# Altium PCB PCB5.PcbDoc
Units mm, origin at the board's own origin, x right, y up, seen from the top; angles counter-clockwise.
Board outline 166 x 110 mm, 2 copper layers (Top Layer, Bottom Layer); 138 components, 60 nets, 332 pads, 80 vias.
Unrouted connection lines stored in the file: 1.
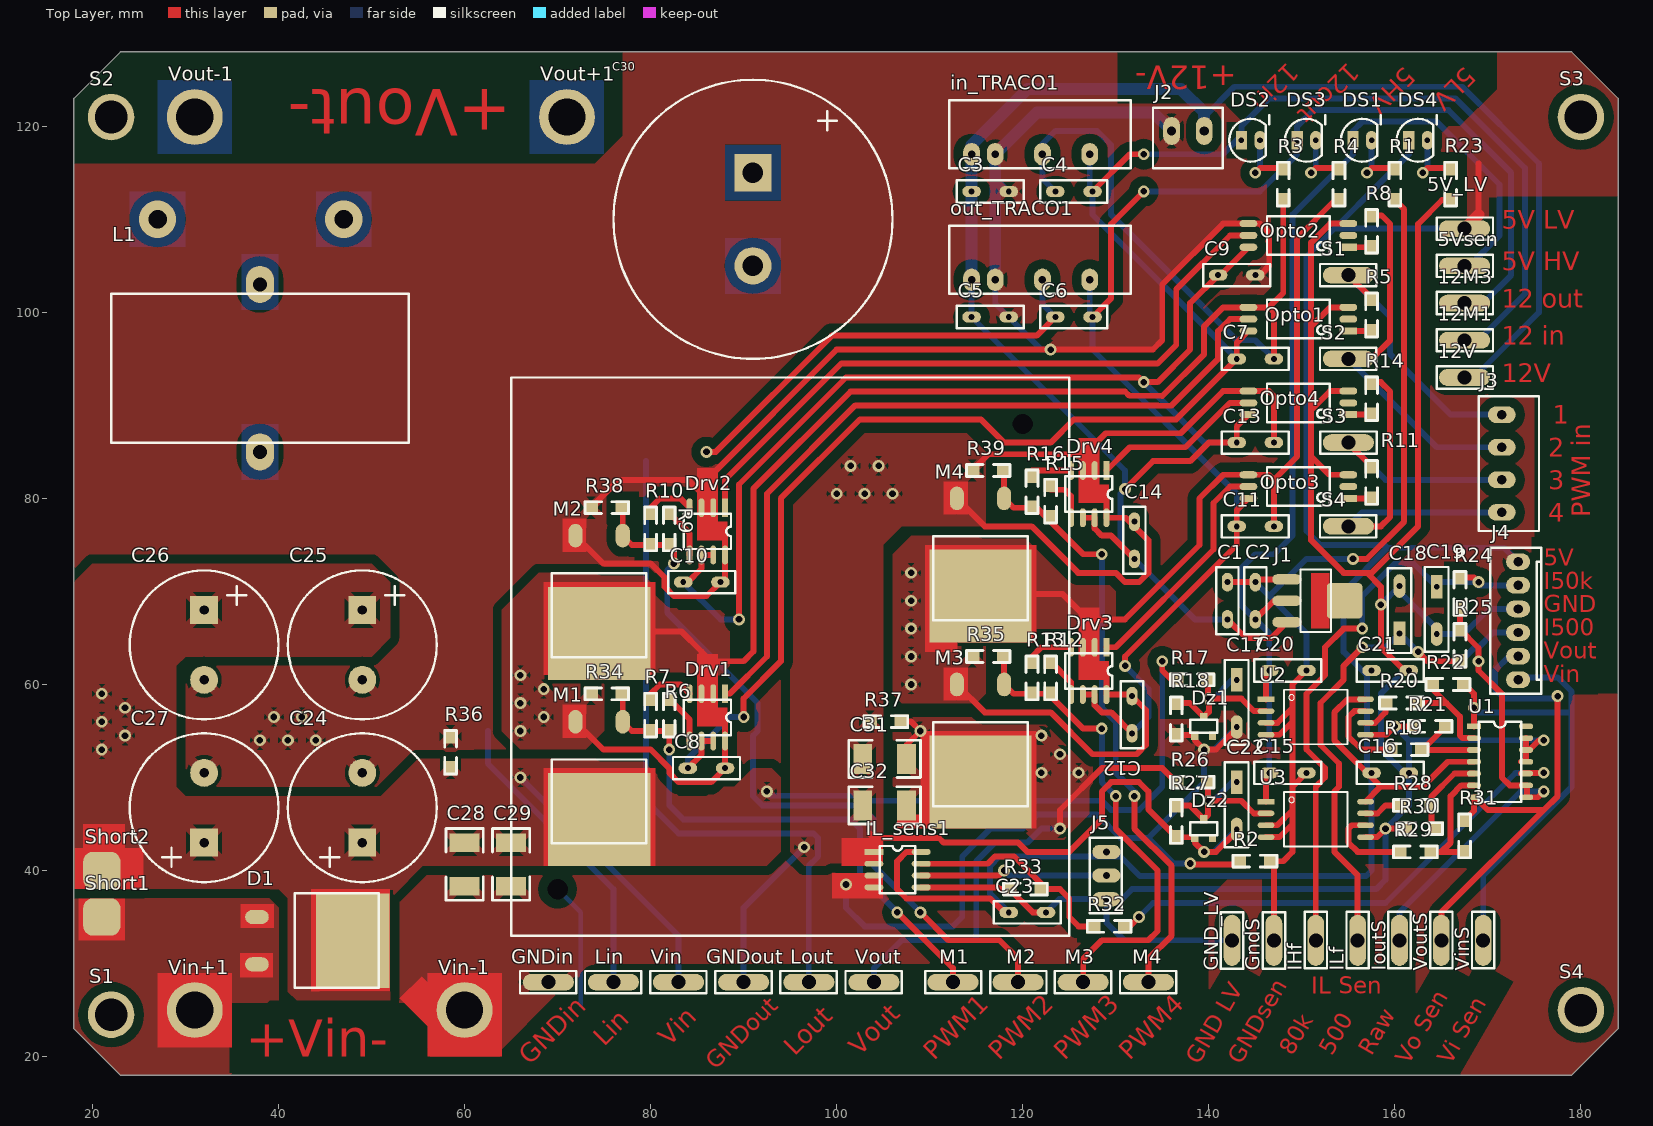
[diagram p0: Top Layer view]
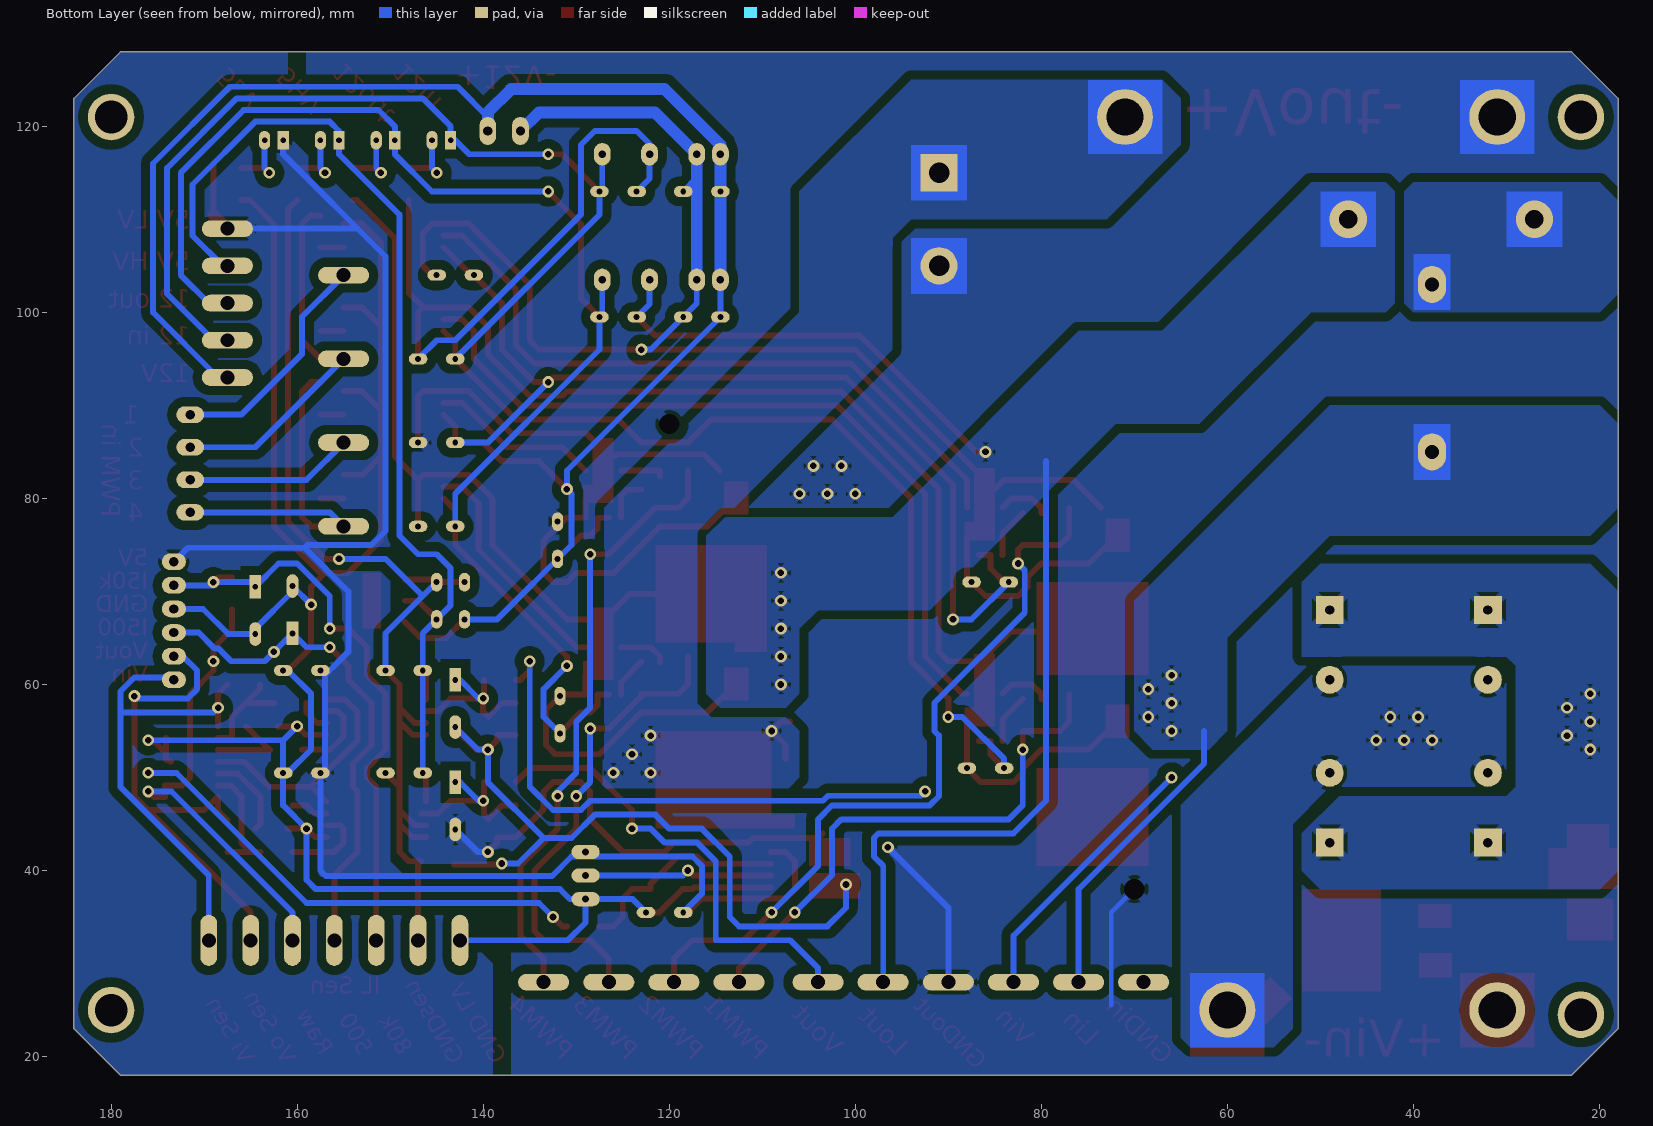
[diagram p1: Bottom Layer view, seen from below]

## Layer stack, top to bottom
Top Solder: solder mask 0.0102, Solder Resist, Dk 3.5
Top Layer: signal copper 0.0356
Dielectric 1: dielectric 0.32, FR-4, Dk 4.8
Bottom Layer: signal copper 0.0356
Bottom Solder: solder mask 0.0102, Solder Resist, Dk 3.5

## Board outline
18,123 23,128 179,128 184,123 184,23 179,18 23,18 18,23

## Design rules (kind name [scope] priority, off if disabled: settings)
Clearance "Polygon Pour" [InPolygon] p1: gap=1
Clearance [All] p2: gap=0.4
Clearance Defoult [InNet('No Net') And OnLayer('Top Layer')] p3: gap=0.4
PlaneConnect [All] p1: planeconnectstyle=Direct reliefexpansion=0.508 reliefentries=4 reliefconductorwidth=0.254 reliefairgap=0.254
PolygonConnect [All] p1: connectstyle=Relief reliefconductorwidth=1 reliefentries=4 polygonreliefangle="45 Angle" airgapwidth=0.4
RoutingVias [All] p1: holewidth=0.711 width=2 viastyle="Through Hole" minholewidth=0.711 minwidth=2 maxholewidth=0.711 maxwidth=2
SolderMaskExpansion [All] p1: expansion=0.102
UnConnectedPin [All] p1:
Width [All] p1: maxlimit=10 minlimit=0.5 preferedwidth=10
29 further rules are at their usual default settings.

## Classes and differential pairs
component class Signal_processing: B? C15 C16 C17 C18 C19 C20 C21 C22 C23 DS4 Dz1 Dz2 IHf IL_sens1 ILf IoutS J4 J5 R17 R18 R19 R20 R21 R22 R23 R24 R25 R26 R27 R28 R29 R30 R31 R32 R33 U1 U2 U3 U? VinS VoutS
component class Drivers: C7 C8 C9 C10 C11 C12 C13 C14 C? Drv1 Drv2 Drv3 Drv4 IC? J3 M1 M2 M3 M4 Opto1 Opto2 Opto3 Opto4 R5 R6 R7 R8 R9 R10 R11 R12 R13 R14 R15 R16 S1 S2 S3 S4
component class Power_supplies: 5V_LV 5Vsen 12M1 12M3 12V C1 C2 C3 C4 C5 C6 DS1 DS2 DS3 GND_LV GNDin GNDout GndS in_TRACO1 J1 J2 Lin Lout out_TRACO1 R1 R2 R3 R4 Vin Vout
component class Switches: C24 C25 C26 C27 C28 C29 C30 C31 C32 D1 L1 M1 M2 M3 M4 R34 R35 R36 R37 R38 R39 S1 S2 S3 S4 Short1 Short2 Vin+1 Vin-1 Vout+1 Vout-1

## Components (designator, comment, footprint, x,y, rotation, side; value= is the part's Value field where it differs from the comment)
5V_LV "Test Point" TEST_POINT 167.5,109 r270 top
5Vsen "Test Point" TEST_POINT 167.5,105 r270 top
12M1 "Test Point" TEST_POINT 167.5,97 r270 top
12M3 "Test Point" TEST_POINT 167.5,101 r270 top
12V "Test Point" TEST_POINT 167.5,93 r270 top
C1 "100nF" CAP100NF_AAU 142,71 r270 top
C2 "100nF" CAP100NF_AAU 145,71 r270 top
C3 "100nF" CAP100NF_AAU 118.5,113 r180 top
C4 "100nF" CAP100NF_AAU 127.5,113 r180 top
C5 "100nF" CAP100NF_AAU 118.5,99.5 r180 top
C6 "100nF" CAP100NF_AAU 127.5,99.5 r180 top
C7 "100nF" CAP100NF_AAU 143,95 r0 top
C8 "100nF" CAP100NF_AAU 88,51 r180 top
C9 "100nF" CAP100NF_AAU 141,104 r0 top
C10 "100nF" CAP100NF_AAU 87.5,71 r180 top
C11 "100nF" CAP100NF_AAU 143,77 r0 top
C12 "100nF" CAP100NF_AAU 131.75,58.75 r270 top
C13 "100nF" CAP100NF_AAU 143,86 r0 top
C14 "100nF" CAP100NF_AAU 132,77.5 r270 top
C15 "100nF" CAP100NF_AAU 150.5,50.5 r180 top
C16 "100nF" CAP100NF_AAU 161.5,50.5 r180 top
C17 "6.6nF" "CONDENSADOR_MKP_200MILIS - DUPLICATE" 143,60.5 r270 top
C18 "4.7nF" "CONDENSADOR_MKP_200MILIS - DUPLICATE" 160.5,65.5 r90 top
C19 "470pF" "CONDENSADOR_MKP_200MILIS - DUPLICATE" 164.5,70.5 r270 top
C20 "100nF" CAP100NF_AAU 150.5,61.5 r180 top
C21 "100nF" CAP100NF_AAU 161.5,61.5 r180 top
C22 "2.7nF" "CONDENSADOR_MKP_200MILIS - DUPLICATE" 143,49.5 r270 top
C23 "100nF" CAP100NF_AAU 122.5,35.5 r180 top
C24 "470µF" CE_16DX35MM_PITCH7.5MM 49,43 r90 top
C25 "470µF" CE_16DX35MM_PITCH7.5MM 49,68 r270 top
C26 "470µF" CE_16DX35MM_PITCH7.5MM 32,68 r270 top
C27 "470µF" CE_16DX35MM_PITCH7.5MM 32,43 r90 top
C28 "100nF" 1812 60,43 r270 top
C29 "1uF" 1812 65,43 r270 top
C30 "820µF" CE_30DX35MM_PITCH10MM 91,115 r270 top
C31 "100nF" 1812 107.5,52 r180 top
C32 "1uF" 1812 107.5,47 r180 top
D1 "????" "D2PAK - DIODE" 37.68,35 r270 top
Drv1 "NCP81074A" NCP81074A 88,59 r270 top
Drv2 "NCP81074A" NCP81074A 88,79 r270 top
Drv3 "NCP81074A" NCP81074A 129,64 r270 top
Drv4 "NCP81074A" NCP81074A 129,83 r270 top
DS1 "Verde" "LED 2MM" 157.5,118.5 r270 top
DS2 "Verde" "LED 2MM" 145.5,118.5 r270 top
DS3 "Verde" "LED 2MM" 151.5,118.5 r270 top
DS4 "Verde" "LED 2MM" 163.5,118.5 r270 top
Dz1 "4.7V" "SOT23 - ZENNER" 138.5,54.5 r0 top
Dz2 "4.7V" "SOT23 - ZENNER" 138.5,43.5 r0 top
GND_LV "Test Point" TEST_POINT 142.5,32.5 r180 top
GNDin "Test Point" TEST_POINT 69,28 r90 top
GNDout "Test Point" TEST_POINT 90,28 r90 top
GndS "Test Point" TEST_POINT 147,32.5 r180 top
IHf "Test Point" TEST_POINT 151.5,32.5 r0 top
IL_sens1 "ACS723LLCTR-20AB-T" SOIC8_GND 104,42 r0 top
ILf "Test Point" TEST_POINT 156,32.5 r0 top
in_TRACO1 "TRACO" TRACO_TMA1212S 114.5,117 r0 top
IoutS "Test Point" TEST_POINT 160.5,32.5 r0 top
J1 "LD1117" SOT-223_LM1117 151.5,69 r270 top
J2 "Cleva 2 vias" "CON2_EXTRON _3.5MMPITCH" 136,119.5 r0 top
J3 "CON4" "CON4_EXTRON _3.5MMPITCH" 171.5,78.5 r90 top
J4 "CON6" CON6_KK_256 173.25,60.5 r90 top
J5 "Cleva 2 vias" CON_3_100MILIS 129,42 r0 top
L1 "mH" TORUS_COIL_1MH 38,85 r90 top
Lin "Test Point" TEST_POINT 76,28 r90 top
Lout "Test Point" TEST_POINT 97,28 r90 top
M1 "MOSFET N" "D2PAK - MOSFET" 77,56 r180 top
M1 "Test Point" TEST_POINT 112.5,28 r270 top
M2 "Test Point" TEST_POINT 119.5,28 r270 top
M2 "MOSFET N" "D2PAK - MOSFET" 77,76 r180 top
M3 "Test Point" TEST_POINT 126.5,28 r90 top
M3 "MOSFET N" "D2PAK - MOSFET" 118,60 r180 top
M4 "Test Point" TEST_POINT 133.5,28 r90 top
M4 "MOSFET N" "D2PAK - MOSFET" 118,80 r180 top
Opto1 "ACPL-W70L" SSOIC6 155,98 r180 top
Opto2 "ACPL-W70L" SSOIC6 155,107 r180 top
Opto3 "ACPL-W70L" SSOIC6 155,80 r180 top
Opto4 "ACPL-W70L" SSOIC6 155,89 r180 top
out_TRACO1 "TRACO" TRACO_TMA1212S 114.5,103.5 r0 top
R1 "RK" 1206 160,115.5 r270 top
R2 "Res. Bridge" 1206 143.25,41 r0 top
R3 "RK" 1206 148,115.5 r270 top
R4 "RK" 1206 154,115.5 r270 top
R5 "560OHM" 1206 157.5,98 r90 top
R6 "25" 1206 82,55 r90 top
R7 "25" 1206 80,55 r90 top
R8 "560OHM" 1206 157.5,107 r90 top
R9 "560OHM" 1206 82,75 r90 top
R10 "560OHM" 1206 80,75 r90 top
R11 "560OHM" 1206 157.5,80 r90 top
R12 "560OHM" 1206 123,59 r90 top
R13 "560OHM" 1206 121,59 r90 top
R14 "560OHM" 1206 157.5,89 r90 top
R15 "560OHM" 1206 123,78 r90 top
R16 "560OHM" 1206 121,79 r90 top
R17 "47k" 1206 136.5,60.5 r0 top
R18 "2k" 1206 136.5,58 r270 top
R19 "11k" 1206 159.5,53 r0 top
R20 "11k" 1206 159,58 r0 top
R21 "27k" 1206 165.5,55.5 r180 top
R22 "27k" 1206 164,60 r0 top
R23 "RK" 1206 166,115.5 r270 top
R24 "6k8" 1206 167,71.5 r270 top
R25 "68k" 1206 167,62.5 r90 top
R26 "120k" 1206 136.5,49.5 r0 top
R27 "2k" 1206 136.5,47 r270 top
R28 "11k" 1206 160.5,47 r0 top
R29 "11k" 1206 160.5,42 r0 top
R30 "27k" 1206 164.5,44.5 r180 top
R31 "27k" 1206 167.5,42 r90 top
R32 "10k" 1206 131,34 r180 top
R33 "10k" 1206 122,38 r180 top
R34 "68K" 1206 77,59 r180 top
R35 "68K" 1206 118,63 r180 top
R36 "33K" 1206 58.5,51 r90 top
R37 "47K" 1206 107,56 r180 top
R38 "68K" 1206 77,79 r180 top
R39 "68K" 1206 118,83 r180 top
S1 "Test Point" TEST_POINT 155,104 r90 top
S1 "Support" SUPPORT 22,24.5 r0 top
S2 "Test Point" TEST_POINT 155,95 r90 top
S2 "Support" SUPPORT 22,121 r0 top
S3 "Test Point" TEST_POINT 155,86 r270 top
S3 "Support" SUPPORT 180,121 r0 top
S4 "Test Point" TEST_POINT 155,77 r90 top
S4 "Support" SUPPORT 180,25 r0 top
Short1 "CON1" SHORTPAD 21,35 r90 top
Short2 "CON1" SHORTPAD 21,40 r90 top
U1 "LMC6484IM" SOIC_14 168.5,55.5 r0 top
U2 "ACPL-C870-000E" SSOP8 151.5,56.5 r0 top
U3 "ACPL-C870-000E" SSOP8 151.5,45.5 r0 top
Vin "Test Point" TEST_POINT 83,28 r90 top
Vin+1 "CON1" POWERHOLE 31,25 r0 top
Vin-1 "CON1" POWERHOLE 60,25 r0 top
VinS "Test Point" TEST_POINT 169.5,32.5 r0 top
Vout "Test Point" TEST_POINT 104,28 r90 top
Vout+1 "CON1" POWERHOLE 71,121 r0 top
Vout-1 "CON1" POWERHOLE 31,121 r0 top
VoutS "Test Point" TEST_POINT 165,32.5 r0 top

## Footprints (in the part's own frame and the unit in brackets; to place one, negate y for a bottom-side part, rotate by r counter-clockwise, add the part's x,y. Pads: shape width x height; smd on the part's side, far side on the other; paste and mask are expansions set on the pad)
1206 [mil] "SMD R&C"
  rect 60x60 smd: 1(0,0) 2(135,0)
  silkscreen extent -25,-25 160,25, body extent 2,-31 128,31
1812 [mm]
  rect 2x3.2 smd: 1(0,0) 2(4.7,0)
  silkscreen extent -1.5,-2 6.2,2
CAP100NF_AAU [mm] "10nF 1600v"
  oval 2x1.2 hole 0.635: 1(0,0) 2(4,0)
  silkscreen extent -1.6,-1.2 5.6,1.2
CE_16DX35MM_PITCH7.5MM [mm]
  rect 3x3 hole 1: 1(0,0)
  round 3 hole 1: 2(7.5,0)
  silkscreen extent -4.25,-8 11.75,8
CE_30DX35MM_PITCH10MM [mm]
  rect 4x4 hole 2.2: 1(0,0)
  round 4 hole 2.2: 2(10,0)
  silkscreen extent -10,-15 20,15
"CON2_EXTRON _3.5MMPITCH" [mm]
  oval 1.8x3 hole 1: 1(0,0) 2(3.5,0)
  silkscreen extent -2,-4 5.5,2.5
"CON4_EXTRON _3.5MMPITCH" [mm]
  oval 1.8x3 hole 1: 1(0,0) 2(3.5,0) 3(7,0) 4(10.5,0)
  silkscreen extent -2,-4 12.5,2.5
CON6_KK_256 [mm]
  oval 1.8x2.6 hole 1: 1(0,0) 2(2.54,0) 3(5.08,0) 4(7.62,0) 5(10.16,0) 6(12.7,0)
  silkscreen extent -1.5,-2.5 14.2,3
CON_3_100MILIS [mil]
  oval 120x60 hole 29.53: 1(0,0) 2(0,-100) 3(0,-200)
  silkscreen extent -70,-260 65,60
"CONDENSADOR_MKP_200MILIS - DUPLICATE" [mm] "10nF 1600v"
  rect 2.54x1.27 hole 0.635: 1(0,0)
  oval 2.54x1.27 hole 0.635: 2(5.08,0)
  silkscreen extent -2.12,-1.27 6.98,1.27
"D2PAK - DIODE" [mil] "TO220-superficie"
  oval 60x100 smd: A(0,0) A(200,0)
  rect 400x310 smd: K(100,405)
  silkscreen extent -100,160 300,515
"D2PAK - MOSFET" [mm] "TO220-superficie"
  rect 11x10 smd: D(2.54,10.5)
  oval 1.524x2.54 smd: G(0,0) S(5.08,0)
  silkscreen extent -2.54,4.06 7.62,13.08
"LED 2MM" [mm] "no está modificado"
  rect 2x1.2 hole 0.6: A(0,-2)
  oval 2x1.2 hole 0.6: K(0,0)
  silkscreen extent -2.72,-3.3 2.3,1
NCP81074A [mil] "Driver"
  rect 80x25 smd: 1(0,0)
  oval 80x25 smd: 2(0,-50) 3(0,-100) 4(0,-150) 5(200,-150) 6(200,-100) 7(200,-50) 8(200,0)
  silkscreen extent 25,-175 175,25
POWERHOLE [mm]
  round 6 hole 4: 1(0,0)
SHORTPAD [mm]
  rrect50% 4x4 smd: 1(0,0)
SOIC8_GND [mil] "Con plano de masa inferior"
  rect 80x25 smd: 1(0,0)
  oval 80x25 smd: 2(0,-50) 3(0,-100) 4(0,-150) 5(200,-150) 6(200,-100) 7(200,-50) 8(200,0)
  silkscreen extent 25,-175 175,25
SOIC_14 [mil]
  rect 60x24 smd: 1(0,0)
  oval 60x24 smd: 2(0,-50) 3(0,-100) 4(0,-150) 5(0,-200) 6(0,-250) 7(0,-300) 8(220.47,-300) 9(220.47,-250) 10(220.47,-200) 11(220.47,-150) 12(220.47,-100) 13(220.47,-50) 14(220.47,0)
  silkscreen extent 20,-320 201,20
"SOT23 - ZENNER" [mm] "Transistor SMD"
  rect 0.8x0.9 smd: A(0,0) K(0.95,2) NC(1.9,0)
  silkscreen extent -0.5,0.3 2.4,1.7
SOT-223_LM1117 [mm] "SOT-223/SC-73; 4 Leads; Body 6.7 x 7.3 mm, inc. leads (LxW max)"
  oval 1.1x3.15 smd: 1(-2.3,-3.1) 2(0,-3.1) 3(2.3,-3.1)
  rrect20% 3.8x3.8 smd: ""(0,3.1)
  silkscreen extent -3.35,-1.63 3.35,1.63
SSOIC6 [mm] "Circuito de 6 patas SMD"
  rect 1.91x0.762 smd: 1(0,0)
  oval 1.91x0.762 smd: 2(0,-1.27) 3(0,-2.54) 4(10.74,-2.54) 5(10.74,-1.27) 6(10.74,0)
  silkscreen extent 2,-3.34 8.74,0.8
SSOP8 [mm]
  rect 1.8x0.6 smd: 1(-5.35,1.905)
  oval 1.8x0.6 smd: 2(-5.35,0.635) 3(-5.35,-0.635) 4(-5.35,-1.905) 5(5.35,-1.905) 6(5.35,-0.635) 7(5.35,0.635) 8(5.35,1.905)
  silkscreen extent -3.4,-2.93 3.4,2.93
SUPPORT [mm]
  round 5 hole 3.5: ""(0,0)
TEST_POINT [mm]
  oval 1.8x5.5 hole 1.5: 1(0,0)
  silkscreen extent -1.2,-3 1.2,3.05
TORUS_COIL_1MH [mm]
  oval 4x3 hole 1.5: 1(0,0) 2(18,0)
  silkscreen extent 1,-16 17,16
TRACO_TMA1212S [mm]
  oval 1.8x2.4 hole 0.8: 1(0,0) 2(2.54,0) 4(7.62,0) 6(12.7,0)
  silkscreen extent -2.4,-1.5 17.1,5.8

## Part data
C1 C2 C3 C4 C5 C6 C7 C8 C9 C10 C11 C12 C13 C14 C15 C16 C17 C18 C19 C20 C21 C22 C23 C28 C29 C31 C32: library part Condensador, "Condensador"
C24 C25 C26 C27 C30: library part Cond_Electrolítico, "Condensador Aluminio con polaridad"
D1: library part Diodo, "Diodo"
DS1 DS2 DS3 DS4: library part Led
Dz1 Dz2: library part Zener
IL_sens1: "Current Sensor AC/DC 5V 8-Pin SOIC N Allegro Microsystems ACS723LLCTR-20AB-T, Current Sensor, 8-Pin, SOIC"
in_TRACO1 out_TRACO1: "TracoPower TMA1212S"
J1: "Linear voltage regulator"
J2: library part Con_2
J4: "CONECTOR 6 PINES"
J5: library part Con_3
L1: library part Bobina
M1 M2 M3 M4: "MOSFET de canal N"
R1 R3 R4 R5 R6 R7 R8 R9 R10 R11 R12 R13 R14 R15 R16 R17 R18 R19 R20 R21 R22 R23 R24 R25 R26 R27 R28 R29 R30 R31 R32 R33 R34 R35 R36 R37 R38 R39: library part Resistencia, "Resistencia"
R2: "Resistencia Bridge"
U1: library part LMC6484IM_1, "14 pin CMOS Quad Rail to Rail Input and Output Operational Amplifier 55 per tube"
U2 U3: "Isolation Amplifier [Broadcom] ACPL-C870-000E Isolation Amplifier"

## Free pads (board coordinates)
  round 0.508 hole 2.2: 2(70,38) 2(120,88)

## Via types
v1: diameter 1.27, hole 0.711, Top Layer to Bottom Layer, 78 vias
v2: diameter 4, hole 2, Top Layer to Bottom Layer, 2 vias

## Nets (pads, with @x,y where several pads share a name; then routed paths per layer and width w, separated by ;. In a path a pad name is that pad's centre, name@x,y a point inside that pad or via, vN(x,y) a via of type N, cw(c..) or ccw(c..) an arc to the next point about the centre after c; other vN are vias at no path point)
5V_HV: 5Vsen.1 C2.2 C15.2 C20.2 DS1.A J1.2 U2.1 U3.1 | length 115.6
  Top Layer w0.635: C2.2 147,69 J1.2 ; U3.1 146.15,50.15 C15.2 ; U2.1 146.15,61.15 C20.2
  Bottom Layer w0.635: C15.2 C20.2 146.5,65.5 C2.2 143.5,68.5 143.5,72.5 145,74 147,74 149,76 149,110.5 155.5,117 DS1.A@155.5,117.5 ; DS1.A 155.5,119.5 156.5,120.5 164.5,120.5 171.25,113.75 171.25,108.25 168,105 5Vsen.1
5V_LV: 5V_LV.1 C16.2 C21.2 C23.2 DS4.A IL_sens1.8 J4.6 J5.1 U1.4 U2.8 U3.8 | length 226.8
  Top Layer w0.635: IL_sens1.8 107.5,42 106.5,41 106.5,38 107.5,37 116.5,37 118,35.5 C23.2 ; U2.8 154.905,58.405 153.5,57 153.5,54 158.472,49.027 U3.8 158.445,49 163,49 165.69,51.69 U1.4 ; 169,110.5 169,116
  Top Layer w1.27: 5V_LV.1 169,110.5
  Bottom Layer w0.635: C23.2 116.5,37.5 116.5,40.5 117.5,41.5 130.5,41.5 132.602,39.398 156.897,39.398 157.5,40 157.5,50 157,50.5 157,61 154.5,63.5 154.5,70 159.2,74.7 ; 153.5,109 5V_LV.1 ; DS4.A@161.5,117.5 161.5,117 150.5,106 150.5,76.5 152,75 158.9,75 159.2,74.7 ; J4.6@173.8,73.2 J4.6 171.75,74.7 159.2,74.7
12V_HV_HS_IN: 12M1.1 C4.1 C7.1 C8.2 Drv1.6 Drv1.7 DS2.A in_TRACO1.6 Opto1.6 | length 205.1
  Top Layer w0.635: C8.2 85.46,52.46 Drv1.6 Drv1.7 ; v1(90,56.5) 90,58.5 94,62.5 94,80 102.5,88.5 115.5,88.5 118,86 123,86 125.5,88.5 136.5,88.5 C7.1 143,96.74 Opto1.6 ; C4.1 131.5,117 v1(133,117)
  Bottom Layer w0.635: C8.2 84,52 88.5,56.5 v1(90,56.5) ; in_TRACO1.6 127.2,113.3 C4.1 127.5,110.5 C7.1 ; v1(133,117) 141.5,117 DS2.A@143.5,119 ; DS2.A 143.5,120 146.5,123 166.5,123 174,115.5 174,102 169,97 12M1.1
12V_HV_HS_OUT: 12M3.1 C6.1 C11.1 C12.2 Drv3.6 Drv3.7 DS3.A Opto3.6 out_TRACO1.6 | length 152.4
  Top Layer w0.635: Drv3.6 Drv3.7 127.73,57.77 128.5,57 129.5,57 C12.2 ; C6.1 129.5,101.5 129.5,109.5 v1(133,113) ; v1(131,62) 131,63 143,75 C11.1 143,78.74 Opto3.6
  Bottom Layer w0.635: out_TRACO1.6 127.2,99.8 C6.1 127.5,96 143,80.5 C11.1 ; v1(131,62) 133.5,59.5 133.5,56.5 C12.2 ; v1(133,113) 145.5,113 149.5,117 DS3.A 149.5,120 151.25,121.75 165.75,121.75 172.5,115 172.5,104 12M3.1@169.5,101 ; 12M3.1 12M3.1@168,101
12V_HV_LS: 12V.1 C1.2 C3.2 C5.2 C9.1 C10.2 C13.1 C14.2 Drv2.6 Drv2.7 Drv4.6 Drv4.7 in_TRACO1.1 J1.3 J2.2 Opto2.6 Opto4.6 out_TRACO1.1 | length 303.5
  Top Layer w0.635: C10.2@84,71 85.46,72.46 Drv2.6 Drv2.7 ; v1(89.5,67) 89.5,81.5 101,93 132.5,93 v1(133,92.5) 134.5,92.5 138,96 138,101 C9.1 ; Drv4.6 Drv4.7 127.73,76.77 128.5,76 129.5,76 C14.2 ; v1(131,81) 134,84 138,84 140,86 C13.1 143,87.74 Opto4.6 ; C9.1@141,103.74 Opto2.6 ; C1.2 144,65 146.7,65 J1.3
  Bottom Layer w0.635: C10.2 87.5,67 v1(89.5,67) ; out_TRACO1.1 C5.2 131,83 v1(131,81) 130.5,80.5 130.5,75 138.5,67 C1.2 ; v1(133,92.5) 139.5,86 C13.1 ; 139.5,121 142.75,124.25 167.25,124.25 175.5,116 175.5,100 168.5,93 12V.1
  Bottom Layer w1.27: out_TRACO1.1 C3.2 in_TRACO1.1 114.5,118 120.5,124 137,124 139.5,121.5 139.5,121
GND_HV_HS_IN: C4.2 C7.2 C8.1 Drv1.2 Drv1.3 Drv1.8 in_TRACO1.4 L1.1 Lin.1 M1.S M2.D Opto1.4 R3.2 R34.2 | length 231.7
  Top Layer w0.635: M1.S 74.92,53 80,53 82,51 82,50.5 83,49.5 86.5,49.5 C8.1 Drv1.8 88,56 86.73,57.27 Drv1.2 Drv1.3 85.46,63.54 ; M2.D@74.46,65.713 83.287,65.713 85.46,63.54 ; 134.965,91.035 131.465,91.035 131,91.5 101.5,91.5 91.035,81.035 91.035,63.535 90,62.5 86.5,62.5 85.46,63.54 ; 135,91 139.5,95.5 139.5,98.5 141.54,100.54 Opto1.4 146.46,100.54 ; C7.2 147,100 146.46,100.54 ; R3.2 148,102.08 146.46,100.54
  Bottom Layer w0.635: 62.5,55 62.5,51.5 76,38 Lin.1 ; C4.2 122.12,114.38 in_TRACO1.4 122.12,118.12 123.5,119.5 128,119.5 129.5,118 129.5,110.5 143,97 145,97 C7.2
  other v1: 66,55 68.5,56.5 66,58 68.5,59.5 66,61
GND_HV_HS_OUT: C6.2 C11.2 C12.1 Drv3.2 Drv3.3 Drv3.8 L1.2 Lout.1 M3.S M4.D Opto3.4 out_TRACO1.4 R4.2 R35.2 | length 244.1
  Top Layer w0.635: v1(86,85) 87,85 99.5,97.5 121.5,97.5 C6.2 ; M3.S 115.92,57 123,57 127.5,52.5 132.25,52.5 133.25,53.5 133.25,57.25 131.58,58.92 Drv3.8 129,61 127.73,62.27 Drv3.2 Drv3.3 126.46,67.54 ; M4.D@115.46,69.713 124.287,69.713 126.46,67.54 ; C11.2 147,82 ; R4.2 153.571,112.071 149.5,108 149.5,84.5 147,82 ; 126.46,67.54 127,67 131,67 139,75 139,80 141.54,82.54 Opto3.4 146.46,82.54 147,82
  Bottom Layer w0.635: 79.5,84 79.5,47.5 83,44 97.5,44 98,43.5 98,41.5 97,40.5 Lout.1 ; out_TRACO1.4 122.12,100.88 C6.2
  other v1: 108,60 108,63 108,66 108,69 108,72
  other v2: 27,110 47,110
GND_HV_LS_IN: C3.1 C5.1 C9.2 C10.1 C17.2 C24.2 C25.2 C26.2 C27.2 C28.2 C29.2 Drv2.2 Drv2.3 Drv2.8 Dz1.A GNDin.1 IL_sens1.3 IL_sens1.4 in_TRACO1.2 J2.1 M2.S Opto2.4 out_TRACO1.2 R2.1 R18.2 R36.2 R38.2 Vin-1.1 | length 257
  Top Layer w0.635: M2.S 74.92,73 80,73 81.5,71.5 81.5,70.5 82.5,69.5 86,69.5 C10.1 88,71.5 Drv2.8 88,76 86.73,77.27 Drv2.2 Drv2.3 85.46,80.54 ; R38.2 76.571,82 84,82 85.46,80.54 ; R18.2 138.429,54.571 Dz1.A 138.5,54 v1(139.5,53) 140.765,53 143,55.235 C17.2 ; v1(138,40.75) 138.103,40.648 R2.1@143.147,40.648 ; C9.2 145.5,104 146.5,105 146.5,108.5 145.46,109.54 Opto2.4 141.54,109.54 135,103 135,97 134,96 100,96 86.5,82.5 86.5,81.58 85.46,80.54
  Bottom Layer w0.635: v1(101,38.5) 101,36 103,34 112.5,34 113.5,35 113.5,41.5 116.5,44.5 120,44.5 121.5,46 128,46 130.5,43.5 133.5,43.5 ; out_TRACO1.2 117.04,100.96 C5.1 122,96 v1(123,96) ; 117.04,114.46 C3.1 ; v1(138,40.75) 136.25,40.75 133.5,43.5 ; C17.2 140.58,53 v1(139.5,53) 139.5,49.5 133.5,43.5
  Bottom Layer w1.27: out_TRACO1.2 117.04,114.46 in_TRACO1.2 121.54,121.5 134,121.5 J2.1
  other v1: 38,54 41,54 44,54 39.5,56.5 42.5,56.5
GND_HV_LS_OUT: C13.2 C14.1 C22.2 C30.2 C31.2 C32.2 Drv4.2 Drv4.3 Drv4.8 Dz2.A GNDout.1 IL_sens1.1 IL_sens1.2 M4.S Opto4.4 pad.2 R27.2 R37.2 R39.2 Vout-1.1 | length 169.6
  Top Layer w0.635: 103.5,44 104,43.5 111,43.5 111.5,43 119.5,43 120.5,42 125,42 128.5,45.5 128.5,48.5 129.5,49.5 132.5,49.5 133.5,48.5 133.5,46.571 R27.2 138.429,43.571 Dz2.A 138.5,43 v1(139.5,42) 140.765,42 143,44.235 C22.2 ; M4.S 115.92,77 120.961,77 125.961,72 130,72 131,71 132.5,71 133.5,72 133.5,75.5 131.08,77.92 Drv4.8 129,80 127.73,81.27 Drv4.2 Drv4.3 126.46,84.54 ; R39.2 116.321,84.75 125.602,84.75 125.812,84.54 126.46,84.54 ; C13.2 147,91 146.46,91.54 Opto4.4 141.54,91.54 137,87 128.92,87 126.46,84.54
  Bottom Layer w0.5: pad.2@70,38 72.5,35.5 72.5,25.5
  Bottom Layer w0.635: GNDout.1 90,36 v1(96.5,42.5) ; v1(139.5,42) 140.58,42 C22.2
  other v1: 100,80.5 103,80.5 106,80.5 101.5,83.5 104.5,83.5
GND_HV_SENSORS: C1.1 C2.1 C15.1 C20.1 GndS.1 J1.1 R1.2 R2.2 U2.3 U2.4 U3.3 U3.4 | length 118.4
  Top Layer w0.635: C1.1 C2.1 145.3,71.3 J1.1 ; U3.4 147.595,43.595 149,45 ; U3.3 147.365,44.865 149,46.5 ; U2.4 147.595,54.595 149,56 ; U2.3 147.365,55.865 149,57.5 ; GndS.1@147,32.75 147,40.679 R2.2 148,41 149,42 149,45 ; C15.1 149,49 ; C20.1 149,60 149,57.5 ; v1(155.5,73.5) 157,73.5 161,77.5 161,111.071 R1.2 ; 149,45 149,46.5 ; 149,46.5 149,49 ; 149,49 149,56 ; 149,56 149,57.5
  Bottom Layer w0.635: C2.1 146.5,69.5 ; C20.1 150.5,65.5 146.5,69.5 ; v1(155.5,73.5) 150.5,73.5 146.5,69.5
GND_LV: C16.1 C18.2 C19.2 C21.1 C23.1 GND_LV.1 IL_sens1.5 J4.4 J5.3 Opto1.3 Opto2.3 Opto3.3 Opto4.3 R21.2 R23.2 R30.2 R33.2 U1.11 U1.12 U1.13 U2.5 U3.5 | length 265
  Top Layer w0.635: IL_sens1.5 117.31,38.19 117.5,38 R33.2 121.071,35.5 C23.1 ; 151,84.5 152.96,82.54 Opto3.3 ; 151,89.5 153.04,91.54 Opto4.3 ; Opto1.3 153.04,100.54 151,98.5 ; Opto2.3 153.04,109.54 151,107.5 151,98.5 ; U3.5 158.095,43.595 v1(159,44.5) R30.2 ; U2.5 159.095,54.595 v1(160,55.5) R21.2 ; C21.1@161,61.5 158.5,64 v1(158.5,68.58) 158.5,70.5 157,72 ; R23.2 165.071,112.071 162.5,109.5 162.5,77 157.5,72 157,72 ; U1.11@173.58,51.69 174.08,51.908 U1.13@174.08,54.23 ; U1.12@174.08,52.96 174.46,52.96 175.5,54 v1(176,54) ; 151,98.5 151,75.5 154.5,72 157,72
  Bottom Layer w0.635: C23.1 123.92,36.92 J5.3 ; GND_LV.1 130.9,32.5 129,34.4 J5.3 ; v1(158.5,68.58) C18.2 ; v1(160,55.5) 161.5,54 ; C18.2@160.5,70 164.5,66 C19.2 167.42,65.42 170.12,68.12 J4.4 ; C16.1@161,50.5 158.5,53 158.5,59 C21.1@161,61.5 ; v1(176,54) 161.5,54 ; J5.3 130.67,36.92 131.75,38 158,38 159,39 v1(159,44.5) 161.5,47 C16.1 161.5,54
NetC18_1: C18.1 ILf.1 J4.3 R25.1 | length 60.1
  Top Layer w0.635: ILf.1@156,32.75 156,39.5 153.5,42 153.5,48.5 154,49 154,51.5 152,53.5 152,58 154.5,60.5 154.5,62 v1(156.5,64) ; v1(162.5,63.5) 163.5,62.5 R25.1
  Bottom Layer w0.635: v1(156.5,64) 159,64 C18.1 163.5,62.5 167.087,62.5 168.44,63.852 168.852,63.852 170.58,65.58 173,65.58 J4.3@173.25,65.83
NetC19_1: C19.1 IHf.1 J4.5 R24.1 | length 63.5
  Top Layer w0.635: IHf.1@151.5,32.75 151.5,49 152.5,50 152.5,51 150.5,53 150.5,59 152.5,61 152.5,64 154.5,66 v1(156.5,66) ; R24.1 168.5,71.5 v1(169,71)
  Bottom Layer w0.635: v1(156.5,66) 156.5,69.5 160,73 162,73 C19.1 165,71 v1(169,71) 169,70.66 172.7,70.66 J4.5@173,70.96
NetD1_A: D1.A Short1.1 Vin+1.1
NetDrv1_1: Drv1.1 Opto1.5 | length 85
  Top Layer w0.635: Drv1.1 88.5,59 92.5,63 92.5,80.5 102,90 134.536,90 134.571,89.965 135.965,89.965 141,95 141,98 142.27,99.27 Opto1.5
NetDrv1_4: Drv1.4 R7.2 | length 5.6
  Top Layer w0.635: R7.2 80,59 81,60 83.19,60 Drv1.4
NetDrv1_5: Drv1.5 R6.2 | length 5.4
  Top Layer w0.635: R6.2 84.19,56.239 Drv1.5
NetDrv2_1: Drv2.1 Opto2.5 | length 73.7
  Top Layer w0.635: Drv2.1 88,82 100.5,94.5 134.5,94.5 136.5,96.5 136.5,102.5 142.27,108.27 Opto2.5
NetDrv2_4: Drv2.4 R10.2 | length 5.6
  Top Layer w0.635: R10.2 80,79 81,80 83.19,80 Drv2.4
NetDrv2_5: Drv2.5 R9.2 | length 5.4
  Top Layer w0.635: R9.2 84.19,76.239 Drv2.5
NetDrv3_1: Drv3.1 Opto3.5 | length 25.3
  Top Layer w0.635: Drv3.1 130,64 140.5,74.5 140.5,79.5 142.27,81.27 Opto3.5
NetDrv3_4: Drv3.4 R13.2 | length 5.2
  Top Layer w0.635: R13.2 121,63 122,64 Drv3.4
NetDrv3_5: Drv3.5 R12.2 | length 4.4
  Top Layer w0.635: R12.2 125.19,60.239 Drv3.5
NetDrv4_1: Drv4.1 Opto4.5 | length 18.3
  Top Layer w0.635: Drv4.1 131.5,85.5 137.5,85.5 142.27,90.27 Opto4.5
NetDrv4_4: Drv4.4 R16.2 | length 4.8
  Top Layer w0.635: R16.2 121,83 Drv4.4
NetDrv4_5: Drv4.5 R15.2 | length 4.8
  Top Layer w0.635: R15.2@123,80.929 124.5,80.929 125.19,80.239 Drv4.5
NetDS1_K: DS1.K R1.1 | length 6.9
  Top Layer w0.635: v1(157,115) 157.5,115.5 R1.1
  Bottom Layer w0.635: v1(157,115) 157.5,115.5 DS1.K
NetDS2_K: DS2.K R3.1 | length 7.4
  Top Layer w0.635: v1(145,115) 145.5,115.5 R3.1
  Bottom Layer w0.635: v1(145,115) 145.5,115.5 DS2.K DS2.K@145.5,119
NetDS3_K: DS3.K R4.1 | length 6.9
  Top Layer w0.635: v1(151,115) 151.5,115.5 R4.1
  Bottom Layer w0.635: v1(151,115) 151.5,115.5 DS3.K
NetDS4_K: DS4.K R23.1 | length 6.9
  Top Layer w0.635: v1(163,115) 163.5,115.5 R23.1
  Bottom Layer w0.635: v1(163,115) 163.5,115.5 DS4.K
NetIL_sens1_6: IL_sens1.6 J5.2 | length 20.4
  Top Layer w0.635: IL_sens1.6 117.46,39.46 v1(118,40)
  Bottom Layer w0.635: v1(118,40) 118.54,39.46 J5.2
NetIL_sens1_7: IL_sens1.7 R32.2 R33.1 | length 23.4
  Top Layer w0.635: IL_sens1.7 116.23,40.73 117,41.5 119.071,41.5 122,38.571 R33.1 124,38 125,37 125,35 126,34 R32.2
NetIoutS_1: IoutS.1 R24.2 R25.2 U1.8 U1.9 | length 50.2
  Top Layer w0.635: R24.2 R25.2 169,63.929 v1(169,62.5) 169,61.5 171.5,59 171.5,50 172.35,49.15 174.2,49.15 174.2,47.88 175.38,47.88 v1(176,48.5)
  Bottom Layer w0.635: IoutS.1 160.5,35.5 173.5,48.5 v1(176,48.5)
NetJ3_1: J3.1 R14.2 S4.1 | length 38
  Top Layer w0.635: S4.1 158.5,77 159.5,78 159.5,91.5 158.5,92.5 157.571,92.5 R14.2
  Bottom Layer w0.635: S4.1 156.5,78.5 J3.1
NetJ3_2: J3.2 R11.2 S3.1 | length 21.8
  Top Layer w0.635: S3.1 155,85.929 R11.2
  Bottom Layer w0.635: S3.1 159,82 J3.2
NetJ3_3: J3.3 R8.2 S2.1 | length 40.6
  Top Layer w0.635: S2.1 157.5,95 159.5,97 159.5,109.5 158.571,110.429 R8.2
  Bottom Layer w0.635: S2.1 164.5,85.5 J3.3
NetJ3_4: J3.4 R5.2 S1.1 | length 28.7
  Top Layer w0.635: S1.1 157.5,101.5 R5.2
  Bottom Layer w0.635: S1.1 159.5,99.5 159.5,95.5 166,89 J3.4
NetJ4_1: J4.1 R22.2 U1.1 VinS.1 | length 52.9
  Top Layer w0.635: R22.2@167.5,60 168.5,59 U1.1
  Bottom Layer w0.635: v1(168.5,57.5) 169,57 179,57 ; VinS.1 169.5,39.5 179,49 179,59.25 177.5,60.75 J4.1@173,60.75
NetJ4_2: J4.2 R31.2 U1.7 VoutS.1 | length 54.4
  Top Layer w0.635: VoutS.1@165,32.75 165,35.5 176,46.5 ; R31.2 168.5,46.429 U1.7 ; U1.7@168.62,47.88 170,46.5 176,46.5 ; v1(177.5,58.75) 177.5,48 176,46.5
  Bottom Layer w0.635: J4.2 172.29,63.04 170.75,61.5 170.75,59.5 171.75,58.5 177.25,58.5 v1(177.5,58.75)
NetM1_1: M1.1 M1.G R6.1 R7.1 R34.1 | length 58.6
  Top Layer w0.635: R34.1 M1.G 78,55 R7.1 R6.1 v1(82,53) ; v1(106.5,35.5) 112.5,29.5 M1.1
  Bottom Layer w0.635: v1(82,53) 82,47 83.5,45.5 101.5,45.5 102.5,44.5 102.5,39.5 v1(106.5,35.5)
NetM2_1: M2.1 M2.G R9.1 R10.1 R38.1 | length 81.3
  Top Layer w0.635: R38.1 M2.G 78,75 R10.1 R9.1 82.5,74.5 v1(82.5,73) ; v1(109,35.5) 112,32.5 117.5,32.5 119.5,30.5 M2.1
  Bottom Layer w0.635: v1(82.5,73) 81.783,72.283 81.783,67.717 91.5,58 91.5,55 91,54.5 91,48 92,47 102.5,47 104,45.5 104,40.5 v1(109,35.5)
NetM3_1: M3.1 M3.G R12.1 R13.1 R35.1 | length 51.6
  Top Layer w0.635: R35.1 M3.G 119,59 R13.1 R12.1 123,58.75 126.5,55.25 v1(128.5,55.25) ; M3.1 126.5,30.5 128.5,32.5 133.5,32.5 134.5,33.5 134.5,40 130,44.5 v1(130,48)
  Bottom Layer w0.635: v1(128.5,55.25) 128.5,49.5 v1(130,48)
NetM4_1: M4.1 M4.G R15.1 R16.1 R39.1 | length 66.1
  Top Layer w0.635: R39.1 M4.G 119,79 R16.1 121.5,79 123,77.5 126.5,74 v1(128.5,74) ; v1(132,48) 132,44.5 136,40.5 136,33 133.5,30.5 M4.1
  Bottom Layer w0.635: v1(128.5,74) 128.5,57.5 130,56 130,50.5 132,48.5 v1(132,48)
NetOpto1_1: Opto1.1 R5.1 | length 2.5
  Top Layer w0.635: Opto1.1 R5.1
NetOpto2_1: Opto2.1 R8.1 | length 2.5
  Top Layer w0.635: Opto2.1 R8.1
NetOpto3_1: Opto3.1 R11.1 | length 2.5
  Top Layer w0.635: Opto3.1 R11.1
NetOpto4_1: Opto4.1 R14.1 | length 2.5
  Top Layer w0.635: Opto4.1 R14.1
NetR19_1: R19.1 U2.7 | length 9.3
  Top Layer w0.635: U2.7 155.635,57.135 155,56.5 155,54.406 156.406,53 R19.1
NetR19_2: R19.2 R21.1 U1.3 | length 9.2
  Top Layer w0.635: R19.2@162.929,52.96 U1.3 ; R19.2 163,53 R21.1
NetR20_1: R20.1 U2.6 | length 3.6
  Top Layer w0.635: U2.6 157.865,55.865 159,57 R20.1
NetR20_2: R20.2 R22.1 U1.2 | length 11.5
  Top Layer w0.635: R20.2 165.539,58 ; R22.1 164,59.539 165.539,58 ; U1.2 167.27,54.23 167,54.5 167,56.539 165.539,58
NetR28_1: R28.1 U3.7 | length 4
  Top Layer w0.635: U3.7 158.135,46.135 159,47 R28.1
NetR28_2: R28.2 R30.1 U1.5 | length 9.3
  Top Layer w0.635: R30.1 163.929,45.071 R28.2 163.929,47.929 166.42,50.42 U1.5
NetR29_1: R29.1 U3.6 | length 9.4
  Top Layer w0.635: U3.6 155.365,44.865 155,44.5 155,43 156,42 R29.1
NetR29_2: R29.2 R31.1 U1.6 | length 13
  Top Layer w0.635: R29.2 R31.1 ; 165,42 166,43 166,48 167.15,49.15 U1.6
NetR32_1: R32.1 U1.10 | length 54.3
  Top Layer w0.635: R32.1 131.5,34 v1(132.5,35) ; U1.10@173.58,50.42 173.66,50.5 v1(176,50.5)
  Bottom Layer w0.635: v1(132.5,35) 134,36.5 159,36.5 172.92,50.42 173,50.5 v1(176,50.5)
VIN: C24.1 C25.1 C26.1 C27.1 C28.1 C29.1 D1.K M1.D R17.1 R36.1 Short2.1 Vin.1 | length 89.8
  Top Layer w0.635: v1(135,62.5) 135,61.5 136,60.5 R17.1
  Bottom Layer w0.635: v1(66,50) 83,33 Vin.1 ; v1(92.5,48.5) 92.965,48.035 102.929,48.035 103.464,47.5 128.5,47.5 129.5,46.5 132.5,46.5 135,49 v1(135,62.5)
  other v1: 21,53 23.5,54.5 21,56 23.5,57.5 21,59
VIN_SEN: C17.1 Dz1.K R17.2 R18.1 U2.2 | length 18.8
  Top Layer w0.635: R18.1 137.95,58 Dz1.K 140,57.05 v1(140,58.5) 143.5,58.5 144.865,57.135 U2.2 ; v1@139.929,58 R17.2
  Bottom Layer w0.635: v1(140,58.5) 140.5,58.5 142.5,60.5 C17.1
VOUT: C30.1 C31.1 C32.1 M3.D R26.1 R37.1 Vout+1.1 Vout.1 | length 55.7
  Top Layer w0.635: R37.1 108,56 v1(109,55) 107.5,53.5 C31.1 ; v1(124,44.5) 124,46.5 128.5,51 135,51 R26.1
  Bottom Layer w0.635: Vout.1 104,29.5 107,32.5 115,32.5 115,41 117,43 120.5,43 122,44.5 v1(124,44.5)
  other v1: 122,50.5 126,50.5 124,52.5 122,54.5
VOUT_SEN: C22.1 Dz2.K R26.2 R27.1 U3.2 | length 18.8
  Top Layer w0.635: R27.1 137.95,47 Dz2.K 139.929,45.979 R26.2 ; v1(140,47.5) 143.5,47.5 144.865,46.135 U3.2 U3.2@146.65,46.135
  Bottom Layer w0.635: v1(140,47.5) 140.5,47.5 142.5,49.5 C22.1
pads on no net: Dz1.NC Dz2.NC J1. Opto1.2 Opto2.2 Opto3.2 Opto4.2 S1. S2. S3. S4. U1.14

## Polygon pours and split planes (outlines as drawn)
GND_HV_HS_OUT on Top Layer "Bottom Layer-No Net" (solid, pour order 44): 106,74 108,76 120,76 125,71 129,71 130,70 130,67 129,66 121,66 120,65 116,65 116,64 116,59 115,58 107,58 106,59
GND_HV_LS_OUT on Top Layer "Bottom Layer-No Net" (solid, pour order 42): 116,77 116,85 114,87 103,87 95,79 95,75 105,75 107,77
VOUT on Top Layer "Bottom Layer-No Net" (solid, pour order 40): 106,55 106,46 107,45 111,45 112,44 120,44 121,43 125,43 127.5,45.5 127.5,51.5 122.5,56.5 107.5,56.5
GND_HV_LS_OUT on Top Layer "Bottom Layer-No Net" (solid, pour order 34): 95,75 105,75 105,52 105,46 105,40.5 96.5,40.5 95,42
GND_HV_HS_IN on Top Layer "Bottom Layer-No Net" (solid, pour order 30): 75,55 73,53 70,53 66,53 64,55 64,68 68,72 79,72 83,68 87.5,68 88.5,67 88.5,62 87.5,61 76,61 75,60
VIN on Top Layer "Bottom Layer-No Net" (solid, pour order 26): 51,36 55.5,40.5 92.5,40.5 94,42 94,50 93,51 91,51 89,49 87,49 86,48 83,48 79,52 68,52 55,52 51,48
VIN on Top Layer "Bottom Layer-No Net" (solid, pour order 8): 42,26 52,26 52,48 30,48 29,49 29,62 30,63 50,63 52,65 52,71 50,73 20,73 18,71 18,40 20,38 40,38 41,37 41,27
NetD1_A on Top Layer "Bottom Layer-No Net" (solid, pour order 4): 40,18 23,18.004 18,23.004 18,37.004 39,37.004 40,36.004
5V_LV on Top Layer "Bottom Layer-No Net" (solid, pour order 66): 184,123 179,128 171,128 171,124 167,120 159,120 159,116 152,109 152,43 149,40 148,39 142,39 140,37 140,18 179,18 184,23 184,59 175,59 175,91 171,91 171,112.5 184,112.5
GND_HV_LS_IN on Top Layer "Bottom Layer-No Net" (solid, pour order 10): 51,62 53,64 53,73 63,83 75,83 75,73 67,73 63,69 63,55 61,53 54,53 50.323,49 31,49 30,50 30,61 31,62
GND_HV_LS_IN on Top Layer "Bottom Layer-No Net" (solid, pour order 64): 23.009,18 18.009,23 18.009,123 23.009,128 159.009,128 159.009,119 149.009,109 149.009,90 149.009,44 147.005,41.995 139,41.995 137.002,39.998 137.002,18
GND_HV_HS_OUT on Bottom Layer "Bottom Layer-No Net" (solid, pour order 62): 41,101 41,113 40,114 20,114 18,112 18,102 20,100 40,100
GND_HV_LS_IN on Bottom Layer "Bottom Layer-No Net" (solid, pour order 12): 50,62 31,62 30,61 30,50 31,49 49,49 53,45 53,23 55,21 64,21 65,22 65,47
VOUT on Bottom Layer "Bottom Layer-No Net" (solid, pour order 58): 73,110 65,118 65,123 67,125 94,125 106,113 106,107 106,100 127,79 127,52 127.5,51.5 127.5,49.5 126,48 108,48 106,50 106,55 107.5,56.5 115.5,56.5 117,58 117,75 96,96 96,108 94,110
GND_HV_LS_OUT on Bottom Layer "Bottom Layer-No Net" (solid, pour order 56): 72,109 64,117 64,123 62,125 28,125 26,123 26,117 28,115 52,115 68,99 76,99 95,80 104,80 106,82 106,84 95,95 95,107 93,109
GND_HV_HS_IN on Bottom Layer "Bottom Layer-No Net" (solid, pour order 52): 18,79 21,76 23,76 49,76 54,71 60,65 60,55 62,53 68,53 70,55 70,69 49,90 20,90 18,88
GND_HV_HS_OUT on Bottom Layer "Bottom Layer-No Net" (solid, pour order 50): 43,100 51,100 63,88 72,88 92,68 104,68 106,66 106,59 107.5,57.5 114.5,57.5 116,59 116,76 114,78 96,78 76,98 67,98 51,114 43,114 42,113 42,101
VIN on Bottom Layer "Bottom Layer-No Net" (solid, pour order 14): 50,73 52,71 52,63 30,63 29,62 29,49 30,48 48,48 52,44 52,40 50,38 20,38 18,40 18,70 21,73
5V_LV on Bottom Layer "Bottom Layer-No Net" (solid, pour order 68): 184,123 179,128 161,128 161,119 157,115 150,108 150,41 139,30 139,18 179,18 184,23
GND_HV_LS_OUT on Bottom Layer "Bottom Layer-No Net" (solid, pour order 70): 18,123 23,128 159,128 159,119 153,113 148,108 148,42 137,31 137,18 23,18 18,23

## Other copper
Top Layer:
  rectangle net VOUT: 106.5,44.5 110,46
  rectangle net GND_HV_HS_OUT: 109.5,63.5 113,65.5
  rectangle: 151,66 153,72
  rectangle net GND_HV_LS_IN: 99.5,37.5 102.5,39.5
  rectangle net VIN: 21,38 25.5,42.412
  rectangle net GND_HV_LS_OUT: 100.5,40.5 105,43.5
  rectangle net GND_HV_LS_IN: 99.5,37 105,39.75
  rectangle net NetD1_A: 18.5,32.5 23.5,37
  rectangle net VIN: 19,40.588 23.5,45
  rectangle net VIN: 18,38 22.5,42.412
  rectangle net NetD1_A: 27,21 35,29
  rectangle net GND_HV_LS_IN: 56,20 64,29
  region net GND_HV_LS_IN: 56.625,22.625 59,25 55.375,28.625 53,26.25
  rectangle net GND_HV_LS_IN: 85,75.5 87.25,83.25
  rectangle net GND_HV_LS_IN: 85,75.5 88.25,77.5
  rectangle net GND_HV_HS_IN: 85,55.5 87.25,63.25
  rectangle net GND_HV_HS_OUT: 126,60.5 128.25,68.25
  rectangle net GND_HV_LS_OUT: 126,79.5 128.25,86.5
  rectangle net GND_HV_HS_IN: 85,55.5 88.25,57.5
  rectangle net GND_HV_HS_OUT: 126,60.5 129.25,62.5
  rectangle net GND_HV_LS_OUT: 126,79.5 129.25,81.5
  rectangle net GND_HV_HS_OUT: 109.5,64.5 121.5,75
  rectangle net GND_HV_HS_IN: 68.5,61 80.5,71
  rectangle net VIN: 68.5,40.5 80.5,51
  rectangle net VOUT: 109,44.5 121.5,55
  rectangle net GND_HV_HS_OUT: 111.5,58.25 114.116,61.838
  rectangle net GND_HV_LS_OUT: 111.5,78.25 114.116,81.838
  rectangle net GND_HV_LS_IN: 70.5,74.25 73.116,77.838
  rectangle net GND_HV_HS_IN: 70.5,54.25 73.116,57.838
  region net NetD1_A: 39.43,28.5 39.43,31.116 35.842,31.116 35.842,28.5
  region net NetD1_A: 35.93,36.42 35.93,33.804 39.518,33.804 39.518,36.42
  rectangle net VIN: 43.5,27 52,38
  pour cut-out: 77,128 77,119 74,116 18.07,116 18,115.93 18,123 23,128
  pour cut-out: 35,18 35,22 39.054,26.054 53,26.054 53,23 56,20 64,20 71,27 74,30 136,30 140,26 140,18
  text "12in" at 148.5,127 h2 r225
  text "12out" at 155,127 h2 r225
  text "+12V-" at 143,126.5 h2.5 r180
  text "5HV" at 161,126.5 h2 r225
  text "5LV" at 167.5,126.5 h2 r225
  text "+Vout-" at 65,124 h5 r180
  text "5V LV" at 171.5,109 h2
  text "5V HV" at 171.5,104.5 h2
  text "12 out" at 171.5,100.5 h2
  text "12 in" at 171.5,96.5 h2
  text "12V" at 171.5,92.5 h2
  text "1" at 177,88 h2
  text "2" at 176.5,84.5 h2
  text "3" at 176.5,81 h2
  text "PWM in" at 181,78 h2 r90
  text "4" at 176.5,77.5 h2
  text "5V" at 176,72.75 h1.8
  text "I50k" at 176,70.25 h1.8
  text "GND" at 176,67.75 h1.8
  text "I500" at 176,65.25 h1.8
  text "Vout" at 176,62.75 h1.8
  text "Vin" at 176,60.25 h1.8
  text "IL Sen" at 151,26.75 h1.8
  text "Lin" at 75,21 h2 r45
  text "Vin" at 82,21 h2 r45
  text "+Vin-" at 36.5,20 h4
  text "Lout" at 95.5,20 h2 r45
  text "Vout" at 102.5,20 h2 r45
  text "80k" at 149,20 h1.8 r60
  text "500" at 153.25,20 h1.8 r60
  text "Raw" at 157.5,20 h1.8 r60
  text "PWM1" at 110.5,19.5 h2 r45
  text "PWM2" at 117.5,19.5 h2 r45
  text "PWM3" at 124.5,19.5 h2 r45
  text "PWM4" at 131.5,19.5 h2 r45
  text "GNDin" at 67,19 h2 r45
  text "GND LV" at 139,19 h1.8 r60
  text "GNDsen" at 143.5,19 h1.8 r60
  text "Vo Sen" at 161.5,19 h1.8 r60
  text "Vi Sen" at 166,19 h1.8 r60
  text "GNDout" at 87,18.5 h1.8 r45
Bottom Layer:
  rectangle net GND_HV_LS_IN: 56,21 64,29
  rectangle net GND_HV_LS_OUT: 27,117 35,125
  rectangle net VOUT: 67,117 75,125
  rectangle net VOUT: 88,112 94,118
  rectangle net GND_HV_LS_OUT: 88,102 94,108
  rectangle net GND_HV_HS_OUT: 24,107 30,113
  rectangle net GND_HV_HS_OUT: 44,107 50,113
  rectangle net GND_HV_HS_OUT: 36,100.25 40,106.25
  rectangle net GND_HV_HS_IN: 36,82 40,88

## Silkscreen, mask and mechanical layers (free items; w line width, h text height)
Top Overlay:
  lines w0.254: 65,93 65,33 125,33 125,93 65,93 ; 65,93 65,93